# EAGLE board hw2 (EAGLE 5.12)
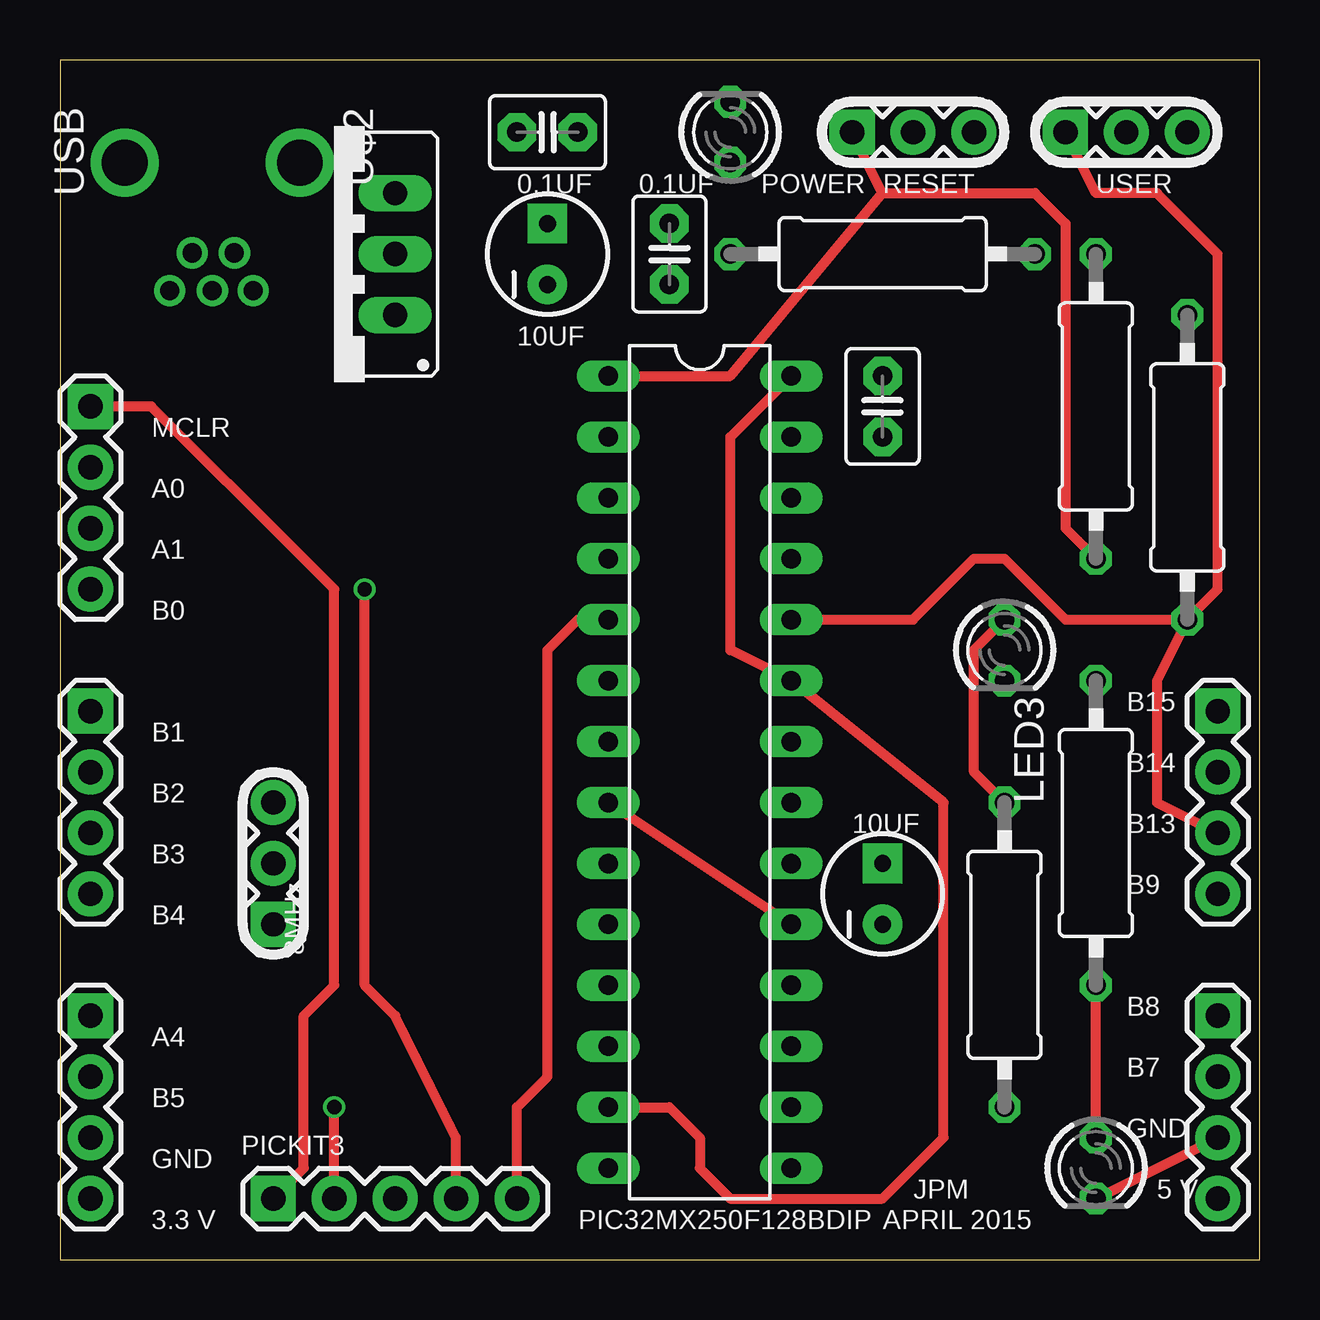
[diagram p0: board, top side]
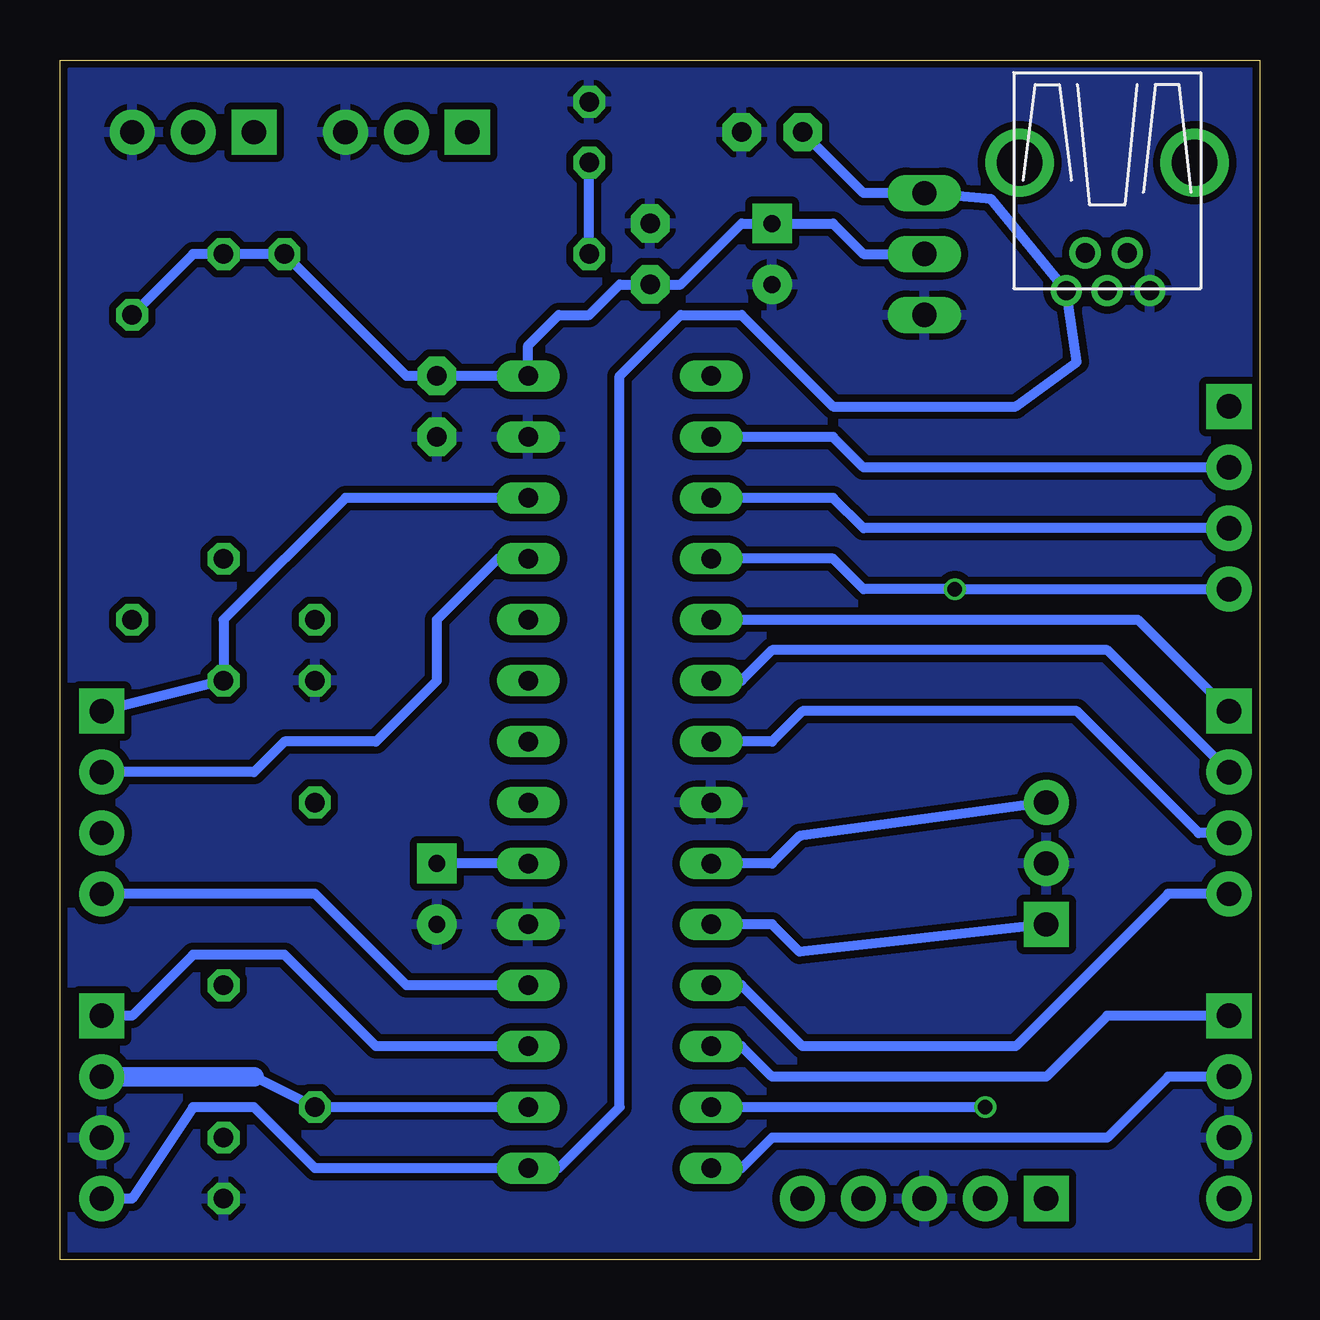
[diagram p1: board, bottom side, seen from below]

Size 50 x 50 mm. Coordinates in mm from the lower left corner, seen from the top.
Outline: 0,0 50,0 50,50 0,50 0,0
Copper layers (1*16): Top 0.035mm / dielectric 1.5mm / Bottom 0.035mm
Design rules "SeeedStudio_2layer_DRU_no_angle_20140221": minimum track width 6mil, minimum drill 12mil, track to track 6mil, track to pad 6mil, pad to pad 6mil, via to via 6mil, smd to smd 0mil, copper to edge 10mil, drill to drill 10mil, minimum pad ring 10mil, minimum via ring 6mil, stop-mask expansion 2mil, vias tented up to drill 100mil, thermal gap 10mil

## Footprints (pad centres in the part's own frame; a part is rotated, then mirrored left to right if it is on the bottom)
1X04 = drill 1.016 pad 1.88 square: 1 0,0 | drill 1.016 pad 1.88 round: 2 2.54,0; 3 5.08,0; 4 7.62,0
C2.5-3 = drill 0.813 pad 1.6 octagon: 1 -1.27,0; 2 1.27,0
LED3MM = drill 0.813 octagon: A -1.27,0; K 1.27,0
1X05 = drill 1.016 pad 1.88 square: 1 0,0 | drill 1.016 pad 1.88 round: 2 2.54,0; 3 5.08,0; 4 7.62,0; 5 10.16,0
0309/12 = drill 0.813 octagon: 1 -6.35,0; 2 6.35,0
DIL28-3 = drill 0.813 long: 1 -16.51,-3.81; 2 -13.97,-3.81; 3 -11.43,-3.81; 4 -8.89,-3.81; 5 -6.35,-3.81; 6 -3.81,-3.81; 7 -1.27,-3.81; 8 1.27,-3.81; 9 3.81,-3.81; 10 6.35,-3.81; 11 8.89,-3.81; 12 11.43,-3.81; 13 13.97,-3.81; 14 16.51,-3.81; 15 16.51,3.81; 16 13.97,3.81; 17 11.43,3.81; 18 8.89,3.81; 19 6.35,3.81; 20 3.81,3.81; 21 1.27,3.81; 22 -1.27,3.81; 23 -3.81,3.81; 24 -6.35,3.81; 25 -8.89,3.81; 26 -11.43,3.81; 27 -13.97,3.81; 28 -16.51,3.81
USB-MINIB = drill 0.8 round: D+ 4.064,0; D- 2.489,0.914; GND 4.064,-1.778; ID 2.489,-0.838; VBUS 4.064,1.702 | drill 1.9 round: P$6 -1.27,-3.65; P$7 -1.27,3.65
1X03 = drill 1.016 pad 1.88 square: 1 0,0 | drill 1.016 pad 1.88 round: 2 2.54,0; 3 5.08,0
TO220 = drill 1.016 long: 1 -2.54,0; 2 0,0; 3 2.54,0
CAP_POL_D = drill 0.7 pad 1.651 square: 1 1.27,0 | drill 0.7 pad 1.651 round: 2 -1.27,0

## Placement (x,y rotation side)
B7  1X04_HEADER  [1X04]  48.26,10.16 270 top
C1  0.1uF  [C2.5-3]  20.32,46.99 0 top
C2  0.1uF  [C2.5-3]  34.29,35.56 270 top
C5  [C2.5-3]  25.4,41.91 90 top
LED1  [LED3MM]  27.94,46.99 90 top
LED2  [LED3MM]  43.18,3.81 270 top
LED3  [LED3MM]  39.37,25.4 270 top
PICKIT3  1X05_HEADER  [1X05]  8.89,2.54 0 top
R1  330  [0309/12]  34.29,41.91 0 top
R2  330  [0309/12]  43.18,17.78 90 top
R3  330  [0309/12]  39.37,12.7 270 top
R4  10K  [0309/12]  46.99,33.02 90 top
R5  10K  [0309/12]  43.18,35.56 90 top
U$1  PIC32MX250F128B  [DIL28-3]  26.67,20.32 270 top
U$2  USB  [USB-MINIB]  6.35,44.45 270 top
U$3  1X03_HEADER  [1X03]  41.91,46.99 0 top
U$4  LD1117  [TO220]  13.97,41.91 90 top
U$5  1X04_HEADER  [1X04]  1.27,35.56 270 top
U$6  1X04_HEADER  [1X04]  48.26,22.86 270 top
U$7  1X04_HEADER  [1X04]  1.27,22.86 270 top
U$8  1X04_HEADER  [1X04]  1.27,10.16 270 top
U$9  1X03_HEADER  [1X03]  8.89,13.97 90 top
U$12  10uF  [CAP_POL_D]  20.32,41.91 90 top
U$13  1X03_HEADER  [1X03]  33.02,46.99 0 top
U$14  10UF  [CAP_POL_D]  34.29,15.24 90 top

## Library data of the parts
B7 C1 C2 C5 LED1-LED3 PICKIT3 R1-R5 U$1-U$9 U$12-U$14 = ME433

## Nets
3.3V: C2.1 C5.1 PICKIT3.2 R1.2 R4.2 R5.2 U$1.13 U$1.23 U$1.28 U$4.2 U$12.1
5V: B7.4 C1.1 U$1.15 U$2.VBUS U$4.3
A0: U$1.2 U$5.2
A1: U$1.3 U$5.3
A4: U$1.12 U$8.1
B0: PICKIT3.4 U$1.4 U$5.4
B1: PICKIT3.5 U$1.5 U$7.1
B2: U$1.6 U$7.2
B3: U$1.7 U$7.3
B4: U$1.11 U$7.4
B5: U$1.14 U$8.2
B7: B7.2 R3.2 U$1.16
B8: B7.1 U$1.17
B9: U$1.18 U$6.4
B13: R4.1 U$1.24 U$3.1 U$6.3
B14: U$1.25 U$6.2
B15: R2.2 U$1.26 U$6.1
D+: U$2.D+
D-: U$2.D-
GND: B7.3 C1.2 C2.2 C5.2 LED1.K LED2.K LED3.K PICKIT3.3 U$1.8 U$1.19 U$1.27 U$2.GND U$3.3 U$4.1 U$8.3 U$9.2 U$12.2 U$13.3 U$14.2
MCLR: PICKIT3.1 U$5.1
N$1: LED2.A R2.1
N$3: LED1.A R1.1
N$4: U$1.10 U$9.1
N$5: LED3.A R3.1
N$7: U$1.9 U$9.3
N$10: U$1.20 U$14.1
P+: U$1.21
P-: U$1.22
RESET: R5.1 U$1.1 U$13.1

## Tracks (layer width: path | path; a pad name or v marks a point on that pad's centre or on a via)
3.3V  (via drill 0.6)
  Top 0.406: PICKIT3.2 v11.43,6.35 | U$1.28 27.94,34.29 27.94,25.4 U$1.23 36.83,19.05 36.83,5.08 34.29,2.54 27.94,2.54 26.67,3.81 26.67,5.08 25.4,6.35 U$1.13
  Bottom 0.406: U$4.2 16.51,41.91 17.78,43.18 U$12.1 21.59,43.18 24.13,40.64 C5.1 26.67,40.64 27.94,39.37 29.21,39.37 30.48,38.1 U$1.28 C2.1 35.56,36.83 R1.2 R5.2 44.45,41.91 R4.2 | v11.43,6.35 U$1.13
5V
  Bottom 0.406: B7.4 46.99,2.54 44.45,6.35 41.91,6.35 39.37,3.81 U$1.15 29.21,3.81 26.67,6.35 26.67,36.83 24.13,39.37 21.59,39.37 17.78,35.56 10.16,35.56 7.62,37.41 U$2.VBUS 11.18,44.2 U$4.3 16.51,44.45 C1.1
A0
  Bottom 0.406: U$5.2 16.51,33.02 17.78,34.29 U$1.2
A1
  Bottom 0.406: U$5.3 16.51,30.48 17.78,31.75 U$1.3
A4
  Bottom 0.406: U$8.1 6.35,10.16 8.89,7.62 20.32,7.62 21.59,8.89 U$1.12
B0  (via drill 0.6)
  Top 0.406: PICKIT3.4 16.51,5.08 13.97,10.16 12.7,11.43 v12.7,27.94
  Bottom 0.406: U$5.4 v12.7,27.94 16.51,27.94 17.78,29.21 U$1.4
B1
  Top 0.406: PICKIT3.5 19.05,6.35 20.32,7.62 20.32,25.4 21.59,26.67 U$1.5
  Bottom 0.406: U$7.1 5.08,26.67 U$1.5
B2
  Bottom 0.406: U$7.2 6.35,25.4 20.32,25.4 21.59,24.13 U$1.6
B3
  Bottom 0.406: U$7.3 2.54,17.78 7.62,22.86 19.05,22.86 20.32,21.59 U$1.7
B4
  Bottom 0.406: U$7.4 3.81,15.24 10.16,8.89 19.05,8.89 21.59,11.43 U$1.11
B5
  Bottom 0.406: U$8.2 3.81,7.62 6.35,5.08 20.32,5.08 21.59,3.81 U$1.14
B7
  Bottom 0.406: 41.91,7.62 R3.2 U$1.16
  Bottom 0.813: 41.91,7.62 B7.2
B8
  Bottom 0.406: B7.1 46.99,10.16 44.45,12.7 40.64,12.7 36.83,8.89 U$1.17
B9
  Bottom 0.406: U$6.4 39.37,15.24 35.56,11.43 U$1.18
B13
  Top 0.406: R4.1 41.91,26.67 39.37,29.21 38.1,29.21 35.56,26.67 U$1.24 | R4.1 48.26,27.94 48.26,41.91 45.72,44.45 43.18,44.45 U$3.1 | U$6.3 45.72,19.05 45.72,24.13 R4.1
B14
  Bottom 0.406: U$6.2 41.91,20.32 40.64,21.59 36.83,21.59 34.29,24.13 34.29,26.67 31.75,29.21 U$1.25
B15
  Bottom 0.406: U$6.1 R2.2 43.18,26.67 38.1,31.75 U$1.26
GND
  Top 0.406: LED2.K B7.3 | U$1.8 U$1.19
  pour Bottom (isolate 0.305): 0,49.53 0,0 49.53,0 49.53,49.53
MCLR
  Top 0.406: U$5.1 3.81,35.56 10.16,29.21 11.43,27.94 11.43,11.43 10.16,10.16 10.16,3.81 PICKIT3.1
N$1
  Top 0.406: LED2.A R2.1
N$3
  Bottom 0.406: R1.1 LED1.A
N$4
  Bottom 0.406: U$1.10 20.32,13.97 19.18,12.83 U$9.1
N$5
  Top 0.406: LED3.A 38.1,25.4 38.1,20.32 R3.1
N$7
  Bottom 0.406: U$1.9 20.32,16.51 19.18,17.65 U$9.3
N$10
  Bottom 0.406: U$1.20 U$14.1
RESET
  Top 0.406: R5.1 41.91,30.48 41.91,43.18 40.64,44.45 34.29,44.45 | 34.29,44.45 U$13.1 | U$1.1 27.94,36.83 34.29,44.45

## Text on the board
tPlace: 0.1UF | 0.1UF | POWER | RESET | USER | 10UF | MCLR | A0 | A1 | B0 | B15 | B1 | B14 | B2 | 10UF | B13 | B3 | B9 | B4 | 8MHz | B8 | A4 | B7 | B5 | GND | GND | JPM | 5 V | 3.3 V | PIC32MX250F128BDIP | APRIL 2015